# Altium PCB DS144-1.0-B溶解氧传感器.PcbDoc
Units mm, origin at the board's own origin, x right, y up, seen from the top; angles counter-clockwise.
Board outline 41 x 64 mm, 2 copper layers (Top Layer, Bottom Layer), stack 1.671 mm thick; 26 components, 33 nets, 97 pads, 89 vias.
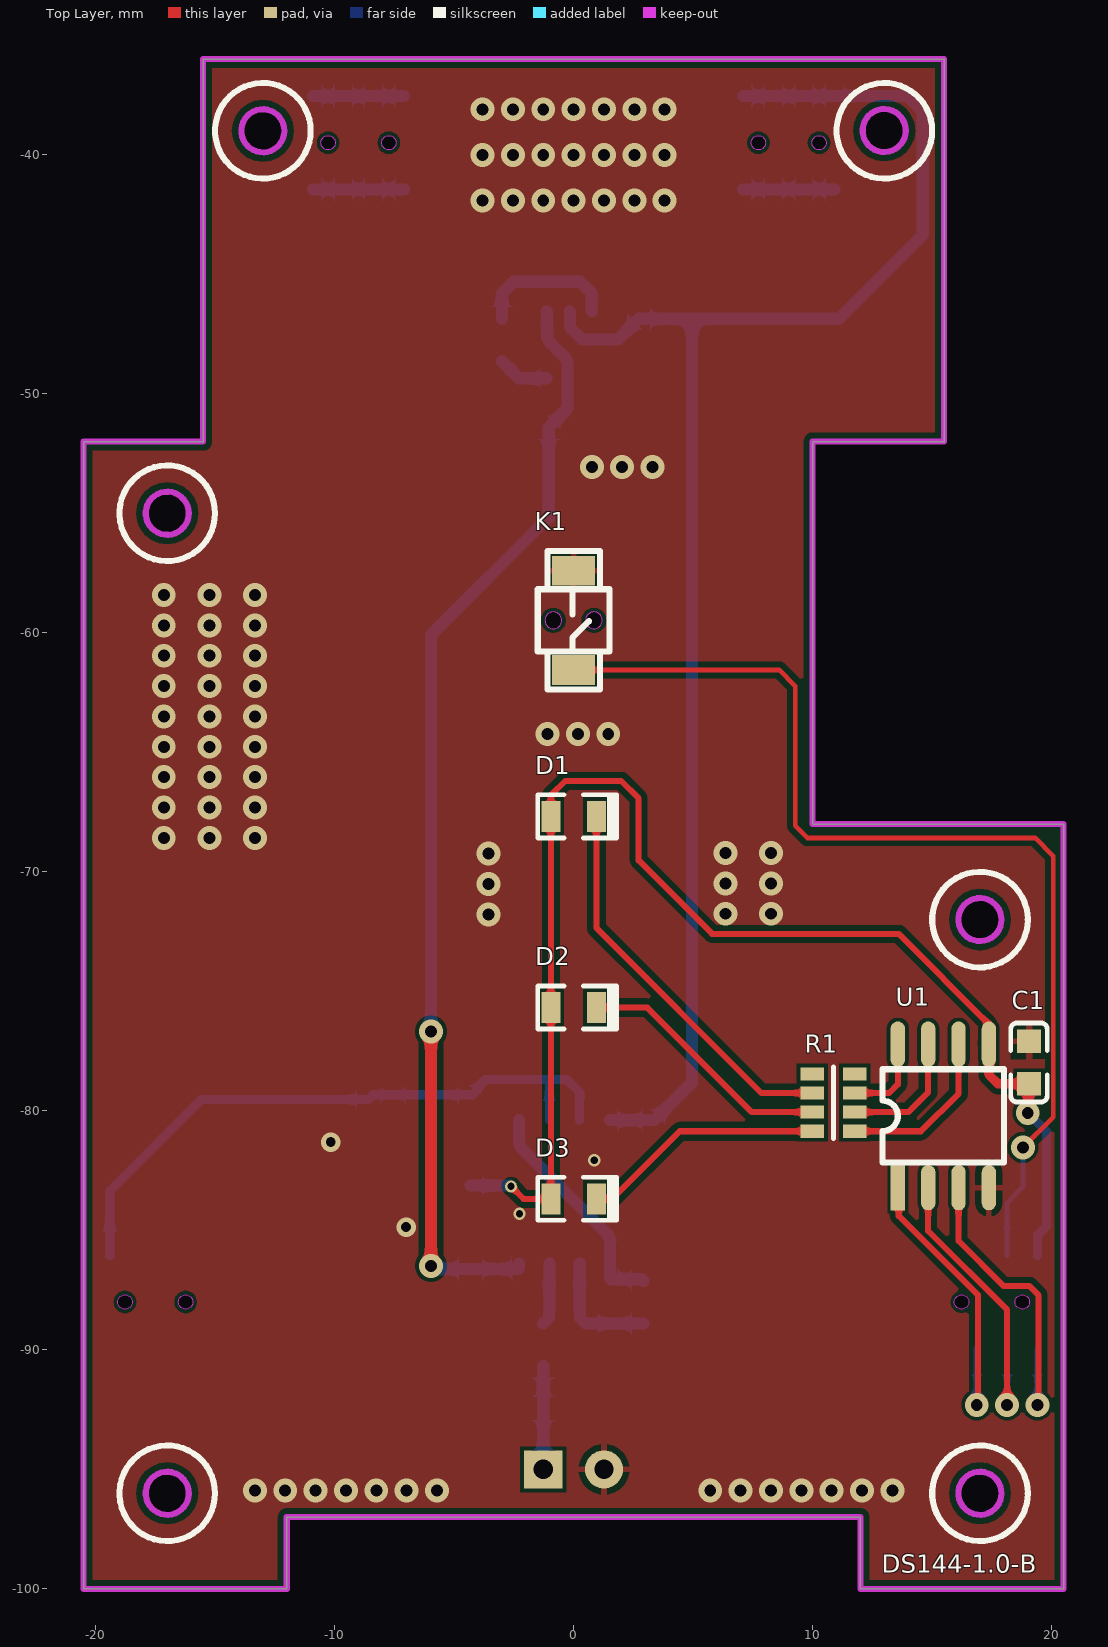
[diagram p0: Top Layer view]
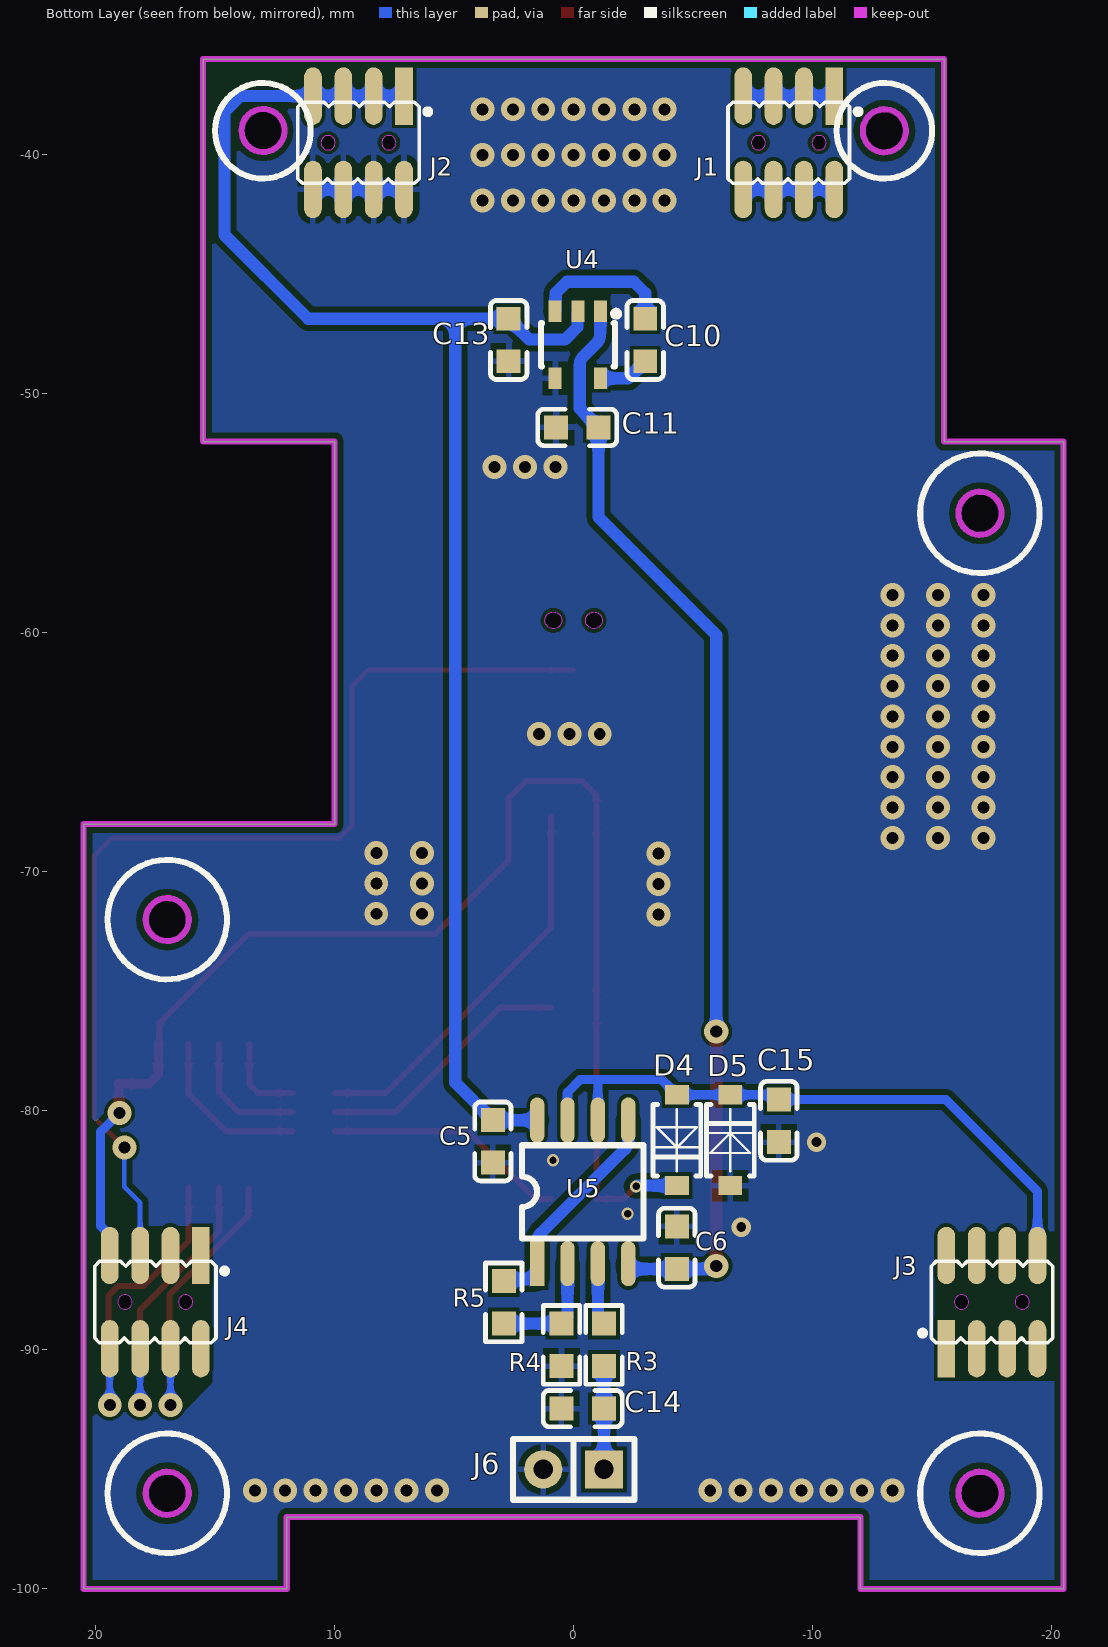
[diagram p1: Bottom Layer view, seen from below]
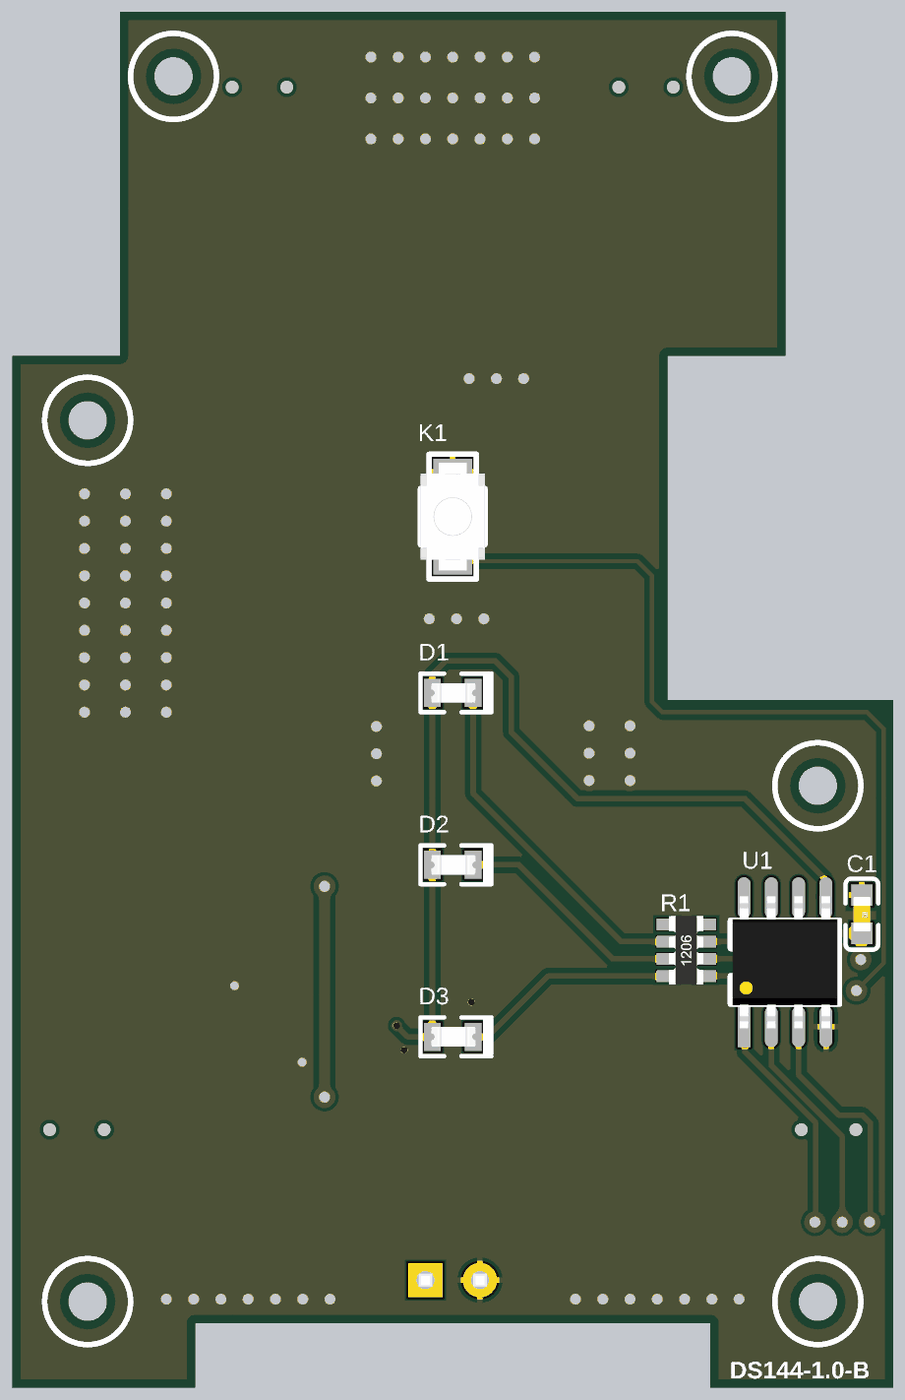
[diagram p2: 3D render of the assembled board from above, using the file's embedded part models]
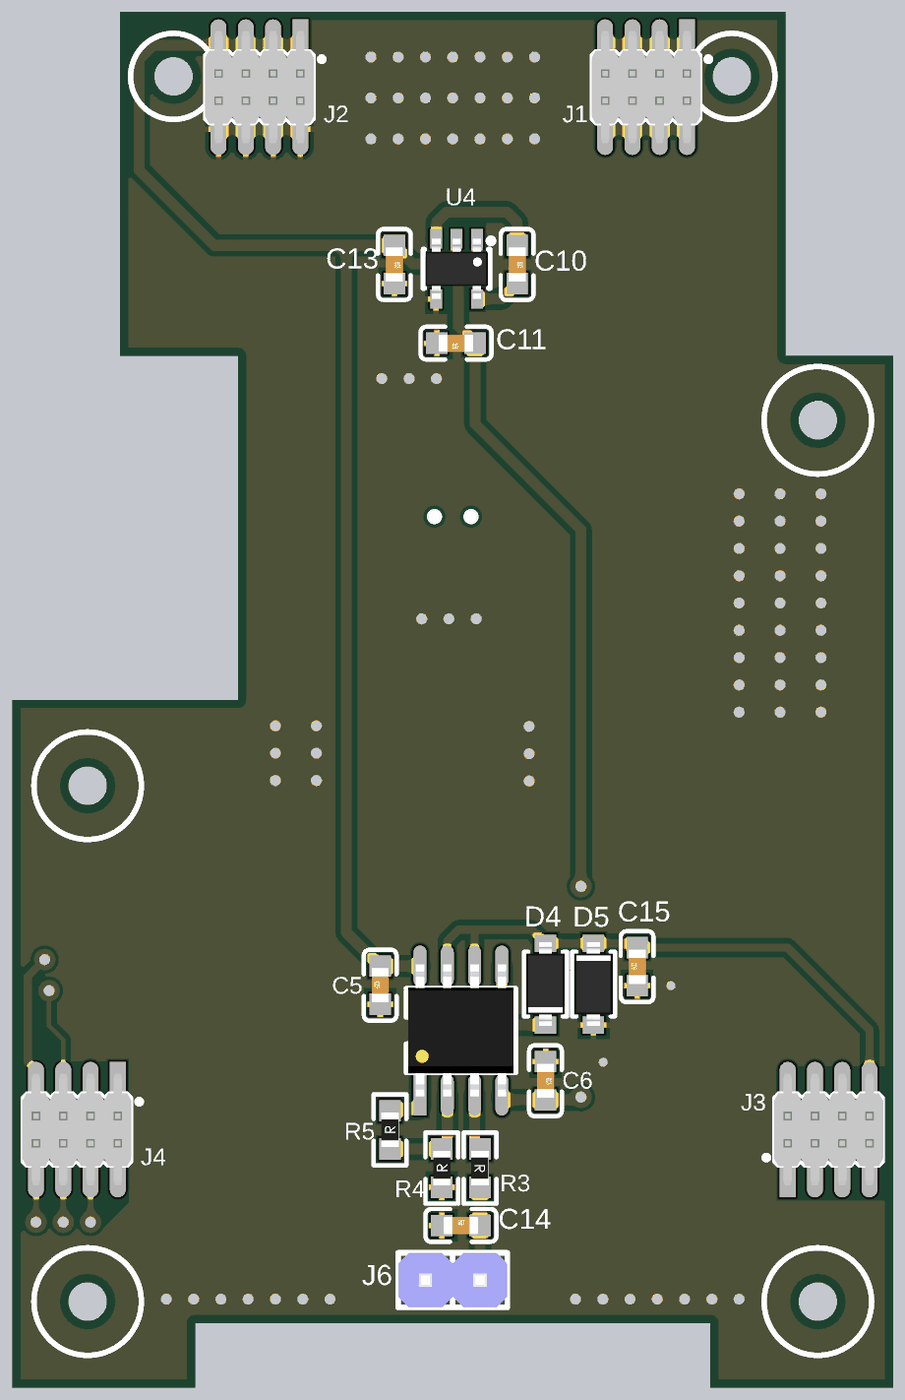
[diagram p3: 3D render of the assembled board from below, using the file's embedded part models]

## Layer stack, top to bottom
Top Solder: solder mask 0.0102, Solder Resist, Dk 3.5
Top Layer: signal copper 0.0356
Dielectric 1: dielectric 1.6, FR-4, Dk 4.8
Bottom Layer: signal copper 0.0356
Bottom Solder: solder mask 0.0102, Solder Resist, Dk 3.5

## Board outline
-20.5,-100 -20.5,-52 -15.5,-52 -15.5,-36 15.5,-36 15.5,-52 10,-52 10,-68 20.5,-68 20.5,-100 12,-100 12,-97 -12,-97 -12,-100
cut-out: -13.9,-39 ccw(c-13,-39) -13,-39.9 ccw(c-13,-39) -12.1,-39 ccw(c-13,-39) -13,-38.1 ccw(c-13,-39)
cut-out: 12.1,-39 ccw(c13,-39) 13,-39.9 ccw(c13,-39) 13.9,-39 ccw(c13,-39) 13,-38.1 ccw(c13,-39)
cut-out: -17.9,-55 ccw(c-17,-55) -17,-55.9 ccw(c-17,-55) -16.1,-55 ccw(c-17,-55) -17,-54.1 ccw(c-17,-55)
cut-out: 16.1,-72 ccw(c17,-72) 17,-72.9 ccw(c17,-72) 17.9,-72 ccw(c17,-72) 17,-71.1 ccw(c17,-72)
cut-out: 16.1,-96 ccw(c17,-96) 17,-96.9 ccw(c17,-96) 17.9,-96 ccw(c17,-96) 17,-95.1 ccw(c17,-96)
cut-out: -17.9,-96 ccw(c-17,-96) -17,-96.9 ccw(c-17,-96) -16.1,-96 ccw(c-17,-96) -17,-95.1 ccw(c-17,-96)

## Design rules (kind name [scope] priority, off if disabled: settings)
Clearance [All] p1: gap=0.152 ignorepadtopadclearanceinfootprint=TRUE except(0.254: Arc-Fill Arc-Poly Arc-Region Track-Fill Track-Poly Track-Region)
PlaneConnect [All] p1: pad.planeconnectstyle=Relief pad.reliefexpansion=0.508 pad.reliefentries=4 pad.reliefconductorwidth=0.254 pad.reliefairgap=0.254 via.planeconnectstyle=Direct via.reliefexpansion=0.508 via.reliefentries=4 via.reliefconductorwidth=0.254 via.reliefairgap=0.254
PolygonConnect [All] p1: thpad.connectstyle=Relief thpad.reliefconductorwidth=0.254 thpad.reliefentries=4 thpad.polygonreliefangle="90 Angle" thpad.airgapwidth=0.254 smdpad.connectstyle=Relief smdpad.reliefconductorwidth=0.254 smdpad.reliefentries=4 smdpad.polygonreliefangle="90 Angle" smdpad.airgapwidth=0.254 via.connectstyle=Direct via.reliefconductorwidth=0.254 via.reliefentries=4 via.polygonreliefangle="90 Angle" via.airgapwidth=0.254
RoutingVias [All] p1: holewidth=0.508 width=1.016 viastyle="Through Hole" minholewidth=0.305 minwidth=0.559 maxholewidth=0.711 maxwidth=1.524
SilkToSilkClearance [All] p1: silktosilkclearance=0.025
SilkToSolderMaskClearance [IsPad] p1: minsilkscreentomaskgap=0.102 clearancetoexposedcopper=TRUE
SolderMaskExpansion [All] p1: expansion=0.102 istentingtop=FALSE
Width [All] p1: maxlimit=0.508 minlimit=0.152 preferedwidth=0.254
27 further rules are at their usual default settings.

## Classes and differential pairs
net class J6_Nets: GND NetC14_2
net class D5_Nets: ADC0 GND
net class D4_Nets: ADC0 VCC_3V3_MCU
net class C15_Nets: ADC0 GND
net class C14_Nets: GND NetC14_2
net class C13_Nets: GND VCC_5V
net class C10_Nets: NetC10_1 NetC10_2
net class U5_Nets: ADC0 NetR3_1 NetR4_2 NetR5_2 VCC_5V VCC_-5V
net class U4_Nets: GND NetC10_1 NetC10_2 VCC_5V VCC_-5V
net class U1_Nets: Dis_blue_EN Dis_green_EN Dis_red_EN GND NetR1_1 NetR1_2 NetR1_3 VCC_3V3_MCU
net class R5_Nets: NetR4_2 NetR5_2
net class R4_Nets: GND NetR4_2
net class R3_Nets: NetC14_2 NetR3_1
net class R1_Nets: LED_blue LED_green LED_red NetR1_1 NetR1_2 NetR1_3
net class K1_Nets: GND KEY_HOME
net class J4_Nets: ADC1 Dis_blue_EN Dis_green_EN Dis_red_EN I2C1_SCL I2C1_SDA KEY_HOME VCC_3V3_MCU
net class J3_Nets: ADC0 DAC_OUT SPI2_CS SPI2_MISO SPI2_MOSI SPI2_SCK USART2_RXD USART2_TXD
net class J2_Nets: GND VCC_5V
net class J1_Nets: VBUS VSS
net class D3_Nets: LED_green VCC_3V3_MCU
net class D2_Nets: LED_red VCC_3V3_MCU
net class D1_Nets: LED_blue VCC_3V3_MCU
net class C6_Nets: GND VCC_-5V
net class C5_Nets: GND VCC_5V
net class C11_Nets: GND VCC_-5V
net class C1_Nets: GND VCC_3V3_MCU

## Components (designator, comment, footprint, x,y, rotation, side; value= is the part's Value field where it differs from the comment)
C1 "SMDCAP00013" 0603CAP 19.05,-77.978 r270 top value=100nF
C5 "SMDCAP00013" 0603CAP 3.378,-81.28 r90 bottom value=100nF
C6 "SMDCAP00013" 0603CAP -4.318,-85.725 r270 bottom value=100nF
C10 "SMDCAP00016" 0603CAP -2.997,-47.752 r270 bottom value=3.3uF
C11 "SMDCAP00016" 0603CAP -0.152,-51.41 r0 bottom value=3.3uF
C13 "SMDCAP00016" 0603CAP 2.718,-47.752 r270 bottom value=3.3uF
C14 "SMDCAP00010" 0603CAP -0.38,-92.456 r180 bottom value=10nF
C15 "SMDCAP00010" 0603CAP -8.585,-80.417 r90 bottom value=10nF
D1 "SMDLED00010" LED_0805 0,-67.68 r0 top value=BLUE
D2 "SMDLED00003" LED_0805 0,-75.68 r0 top value=RED
D3 "Chip 翠绿LED 0805" LED_0805 0,-83.68 r0 top value=GREEN
D4 "DIPDIODE02001" SOD-123 -4.318,-81.229 r270 bottom value=1N4148
D5 "DIPDIODE02001" SOD-123 -6.553,-81.229 r90 bottom value=1N4148
J1 "X1321WVS-2x04J-C40D53" X1321WVS-2x04J-C40D53 -9,-39.5 r0 bottom value=2*4P
J2 "X1321WVS-2x04J-C40D53" X1321WVS-2x04J-C40D53 9,-39.5 r0 bottom value=2*4P
J3 "X1321WVS-2x04J-C40D53" X1321WVS-2x04J-C40D53 -17.5,-88 r180 bottom value=2*4P
J4 "X1321WVS-2x04J-C40D53" X1321WVS-2x04J-C40D53 17.5,-88 r0 bottom value=2*4P
J6 "SL000000042" SIP2 0,-95 r0 bottom value=2P
K1 "TS-1185-B-A-A-A" KEY_TS-1185-x-A-A-A 0,-59.48 r270 top
R1 "SMDRES05003" 0603RES_Pack4 10.871,-79.655 r180 top value=510R
R3 "SMDRES00058" 0603RES -1.27,-89.789 r270 bottom value=20K
R4 "SMDRES00058" 0603RES 0.508,-89.789 r90 bottom value=20K
R5 "SMDRES00085" 0603RES 2.921,-88.011 r90 bottom value=1M
U1 "SMDIC000018" SO-8 15.469,-80.211 r90 top value=ULN2001
U4 "SGM3206" SOT23-5 -0.178,-47.953 r0 bottom value=丝印SL7NL
U5 "TL062C" SO-8 -0.381,-83.388 r90 bottom

## Footprints (in the part's own frame and the unit in brackets; to place one, negate y for a bottom-side part, rotate by r counter-clockwise, add the part's x,y. Pads: shape width x height; smd on the part's side, far side on the other; paste and mask are expansions set on the pad)
0603CAP [mm]
  rect 1x1 smd: 1(-0.889,0) 2(0.89,0)
  silkscreen extent -1.65,-0.76 1.65,0.76, body extent -0.8,-0.4 0.8,0.4, height 0.3
0603RES [mm]
  rect 1x1 smd: 1(-0.889,0) 2(0.889,0)
  silkscreen extent -1.65,-0.76 1.65,0.76, body extent -0.8,-0.41 0.8,0.41, height 0.51
0603RES_Pack4 [mm]
  rect 1x0.55 smd mask+0.05: 1(-0.889,1.2) 2(-0.889,0.4) 3(-0.889,-0.4) 4(-0.889,-1.2) 5(0.889,-1.2) 6(0.889,-0.4) 7(0.889,0.4) 8(0.889,1.2)
  silkscreen extent 0,-1.5 0,1.5, body extent -0.8,-1.6 0.8,1.6, height 0.5
KEY_TS-1185-x-A-A-A [mm]
  rect 1.25x1.8 smd: 1(-2.075,0) 2(2.075,0)
  Keep-Out Layer board cut-out: -0.35,0.85 -0.323,0.716 -0.247,0.603 -0.134,0.527 0,0.5 0,0.5 0.134,0.527 0.247,0.603 0.323,0.716 0.35,0.85 0.35,0.85 0.323,0.984 0.247,1.097 0.134,1.173 0,1.2 0,1.2 -0.134,1.173 -0.247,1.097 -0.323,0.984 -0.35,0.85
  Keep-Out Layer board cut-out: 0.35,-0.85 0.323,-0.716 0.247,-0.603 0.134,-0.527 0,-0.5 0,-0.5 -0.134,-0.527 -0.247,-0.603 -0.323,-0.716 -0.35,-0.85 -0.35,-0.85 -0.323,-0.984 -0.247,-1.097 -0.134,-1.173 0,-1.2 0,-1.2 0.134,-1.173 0.247,-1.097 0.323,-0.984 0.35,-0.85
  silkscreen extent -2.9,-1.5 2.9,1.5, body extent -2.5,-1.5 2.5,1.5, height 2
LED_0805 [mm]
  rect 0.8x1.3 smd: 1(-0.95,0) 2(0.95,0)
  silkscreen extent -1.5,-0.9 1.8,0.9, body extent -1,-0.45 1.06,0.45, height 0.85
SIP2 [mm]
  rect 1.6x1.6 hole 0.813: 1(-1.27,0)
  round 1.6 hole 0.813: 2(1.27,0)
  silkscreen extent -2.54,-1.27 2.54,1.27, body extent -2.54,-1.27 2.54,1.27, height 8.64
SO-8 [mm]
  rect 1.9x0.6 smd: 1(-3,1.905)
  oval 1.9x0.6 smd: 2(-3,0.635) 3(-3,-0.635) 4(-3,-1.905) 5(3,-1.905) 6(3,-0.635) 7(3,0.635) 8(3,1.905)
  silkscreen extent -1.95,-2.54 1.95,2.54, body extent -3.07,-2.44 3.07,2.44, height 1.77
SOD-123 [mm]
  rect 0.8x1 smd: 1(-1.9,0) 2(1.9,0)
  silkscreen extent -1.5,-1 1.5,1, body extent -1.95,-0.9 1.95,0.9, height 1.18
SOT23-5 [mm] "SOT-23/SC-74A; 5 Leads; Body 3.1 x 3 mm, inc. leads (LxW max)"
  rect 0.55x0.9 smd: 1(-0.95,-1.4) 2(0,-1.4) 3(0.95,-1.4) 4(0.95,1.4) 5(-0.95,1.4)
  silkscreen extent -1.7,-1.4 1.55,0.9, body extent -1.45,-1.4 1.45,1.4, height 1.45
X1321WVS-2x04J-C40D53 [mm]
  rect 0.74x2.4 smd: 1(-1.905,-1.95)
  oval 0.74x2.4 smd: 2(-1.905,1.95) 3(-0.635,-1.95) 4(-0.635,1.95) 5(0.635,-1.95) 6(0.635,1.95) 7(1.905,-1.95) 8(1.905,1.95)
  Keep-Out Layer board cut-out: 1.57,0 1.547,0.115 1.482,0.212 1.385,0.277 1.27,0.3 1.27,0.3 1.155,0.277 1.058,0.212 0.993,0.115 0.97,0 0.97,0 0.993,-0.115 1.058,-0.212 1.155,-0.277 1.27,-0.3 1.27,-0.3 1.385,-0.277 1.482,-0.212 1.547,-0.115 1.57,0
  Keep-Out Layer board cut-out: -1.57,0 -1.547,-0.115 -1.482,-0.212 -1.385,-0.277 -1.27,-0.3 -1.27,-0.3 -1.155,-0.277 -1.058,-0.212 -0.993,-0.115 -0.97,0 -0.97,0 -0.993,0.115 -1.058,0.212 -1.155,0.277 -1.27,0.3 -1.27,0.3 -1.385,0.277 -1.482,0.212 -1.547,0.115 -1.57,0
  silkscreen extent -3,-1.7 2.54,1.7, body extent -2.54,-2.6 2.54,2.6, height 5.5

## Part data
C1 C5 C6: library part "MLCC 100nF 50V ±10％ 0603", "贴片电容"
C10 C11 C13: library part "MLCC 10uF 50V ±10％ 0603", "贴片电容"
C14 C15: library part "MLCC 10nF 50V ±10％ 0603", "贴片电容"
D1: library part "Chip 蓝色LED 0805", "贴片LED"
D2: library part "Chip 红色LED 0805", "贴片LED"
D3: "贴片LED"
D4 D5: library part 1N4148W, "贴片开关二极管 T4"
J1 J2 J3 J4: "双排针2x4P 立贴 1.27mm"
J6: library part "DIP2 单排直针 1*40P 间距2.54mm 针长11mm 铜", "单排直针"
K1: "轻触开关"
R1: library part "Chip R*4 510R 1/16W ±5％ 0603", "贴片排阻"
R3 R4: library part "Chip 20K 1/16W ±1％ 0603", "贴片电阻"
R5: library part "Chip 1M 1/16W ±1％ 0603", "贴片电阻"
U1: library part "ULN2001 SOP-8", "电机驱动芯片"
U4: "电荷泵芯片"

## Via types
v1: diameter 1, hole 0.5, Top Layer to Bottom Layer, tented both sides, 82 vias
v2: diameter 0.508, hole 0.305, Top Layer to Bottom Layer, tented both sides, 3 vias
v3: diameter 1.016, hole 0.508, Top Layer to Bottom Layer, tented both sides, 2 vias
v4: diameter 0.813, hole 0.406, Top Layer to Bottom Layer, tented both sides, 2 vias

## Nets (pads, with @x,y where several pads share a name; then routed paths per layer and width w, separated by ;. In a path a pad name is that pad's centre, name@x,y a point inside that pad or via, vN(x,y) a via of type N, cw(c..) or ccw(c..) an arc to the next point about the centre after c; other vN are vias at no path point)
ADC0: C15.2 D4.1 D5.2 J3.8 U5.6 U5.7 | length 27.4
  Bottom Layer w0.381: J3.8 -19.405,-83.362 -15.57,-79.527 C15.2 -8.387,-79.329 D5.2 D4.1 -4.218,-79.329 -4.008,-79.12 -4.008,-79.02 -3.678,-78.689 -0.991,-78.689 ; U5.6 -1.016,-78.715 -0.991,-78.689 ; U5.7 0.254,-79.223 -0.279,-78.689 -0.991,-78.689
ADC1: J4.2
DAC_OUT: J3.6
Dis_blue_EN: J4.4 U1.1 | length 12.8
  Top Layer w0.254: U1.1@13.603,-83.25 13.603,-84.393 16.911,-87.701 16.911,-92.257 v1(16.865,-92.303)
  Bottom Layer w0.254: v1(16.865,-92.303) J4.4
Dis_green_EN: J4.8 U1.3 | length 13.5
  Top Layer w0.254: U1.3 16.104,-85.446 17.977,-87.319 19.052,-87.319 19.451,-87.718 19.451,-92.257 v1(19.405,-92.303)
  Bottom Layer w0.254: v1(19.405,-92.303) J4.8
Dis_red_EN: J4.6 U1.2 | length 12.8
  Top Layer w0.254: U1.2 14.834,-85.027 18.135,-88.328 v1(18.135,-92.303)
  Bottom Layer w0.254: v1(18.135,-92.303) J4.6
GND: C1.1 C5.1 C6.1 C11.2 C13.2 C14.1 C15.1 D5.1 J2.2 J2.4 J2.6 J2.8 J6.2 K1.1 R4.1 U1.4 U4.4 | length 3.8
  Bottom Layer w0.508: J2.2 J2.4 J2.6 J2.8
  other v1: -13.335,-95.885 -12.065,-95.885 -10.795,-95.885 -9.525,-95.885 -8.255,-95.885 -6.985,-95.885 -5.715,-95.885 5.715,-95.885 6.985,-95.885 8.255,-95.885 9.525,-95.885 10.795,-95.885 12.065,-95.885 13.335,-95.885 -3.556,-71.78 6.35,-71.755 8.255,-71.755 -3.556,-70.51 6.35,-70.485 8.255,-70.485 -3.556,-69.24 6.35,-69.215 8.255,-69.215 -17.145,-68.58 -15.24,-68.58 -13.335,-68.58 -17.145,-67.31 -15.24,-67.31 -13.335,-67.31 -17.145,-66.04 -15.24,-66.04 -13.335,-66.04 -17.145,-64.77 -15.24,-64.77 -13.335,-64.77 -1.092,-64.237 0.178,-64.237 1.448,-64.237 -17.145,-63.5 -15.24,-63.5 -13.335,-63.5 -17.145,-62.23 -15.24,-62.23 -13.335,-62.23 -17.145,-60.96 -15.24,-60.96 -13.335,-60.96 -17.145,-59.69 -15.24,-59.69 -13.335,-59.69 -17.145,-58.42 -15.24,-58.42 -13.335,-58.42 0.762,-53.061 2.032,-53.061 3.302,-53.061 -3.81,-41.91 -2.54,-41.91 -1.27,-41.91 0,-41.91 1.27,-41.91 2.54,-41.91 3.81,-41.91 -3.81,-40.005 -2.54,-40.005 -1.27,-40.005 0,-40.005 1.27,-40.005 2.54,-40.005 3.81,-40.005 -3.81,-38.1 -2.54,-38.1 -1.27,-38.1 0,-38.1 1.27,-38.1 2.54,-38.1 3.81,-38.1
  other v2: -2.261,-84.303 0.864,-82.067
  other v4: -7.01,-84.861 -10.16,-81.305
I2C1_SCL: J4.1
I2C1_SDA: J4.3
KEY_HOME: J4.5 K1.2 | length 44.2
  Top Layer w0.2: K1.2 8.596,-61.555 9.271,-62.23 9.271,-68.072 9.779,-68.58 19.304,-68.58 20.066,-69.342 20.066,-80.264 v1(18.796,-81.534)
  Bottom Layer w0.2: J4.5 18.135,-83.846 18.796,-83.185 v1(18.796,-81.534)
LED_blue: D1.2 R1.6 | length 16.6
  Top Layer w0.254: D1.2 0.95,-72.35 7.855,-79.255 R1.6
LED_green: D3.2 R1.8 | length 10.2
  Top Layer w0.254: D3.2 1.613,-83.68 4.439,-80.855 R1.8
LED_red: D2.2 R1.7 | length 10.8
  Top Layer w0.254: D2.2 3.087,-75.68 7.461,-80.055 R1.7
NetC10_1: C10.1 U4.3 | length 6
  Bottom Layer w0.508: C10.1 -2.997,-45.796 -2.515,-45.314 0.279,-45.314 0.752,-45.786 0.752,-46.532 U4.3
NetC10_2: C10.2 U4.5 | length 2.2
  Bottom Layer w0.508: C10.2 -2.287,-49.353 U4.5
NetC14_2: C14.2 J6.1 R3.2 | length 4.3
  Bottom Layer w0.508: J6.1 C14.2 R3.2
NetR1_1: R1.1 U1.6 | length 7.1
  Top Layer w0.254: R1.1 14.529,-80.855 16.104,-79.28 U1.6
NetR1_2: R1.2 U1.7 | length 5.4
  Top Layer w0.254: R1.2 14.002,-80.055 14.834,-79.223 U1.7
NetR1_3: R1.3 U1.8 | length 3.6
  Top Layer w0.254: R1.3 13.202,-79.255 13.564,-78.893 U1.8
NetR3_1: R3.1 U5.3 | length 2.6
  Bottom Layer w0.508: R3.1 -1.024,-88.654 -1.024,-88.364 -1.016,-88.356 U5.3
NetR4_2: R4.2 R5.1 U5.2 | length 5
  Bottom Layer w0.508: U5.2 0.254,-88.356 0.262,-88.364 0.262,-88.654 R4.2 R5.1
NetR5_2: R5.2 U5.1 U5.5 | length 9.6
  Bottom Layer w0.508: U5.5 -2.286,-81.25 ccw(c-1.778,-81.247) -2.139,-81.605 1.376,-85.12 cw(c1.016,-85.478) 1.524,-85.478 U5.1 1.524,-86.998 1.57,-87.044 2.843,-87.044 R5.2
SPI2_CS: J3.4
SPI2_MISO: J3.1
SPI2_MOSI: J3.3
SPI2_SCK: J3.2
USART2_RXD: J3.5
USART2_TXD: J3.7
VBUS: J1.2 J1.4 J1.6 J1.8 | length 3.8
  Bottom Layer w0.508: J1.2 J1.4 J1.6 J1.8
VCC_3V3_MCU: C1.2 D1.1 D2.1 D3.1 D4.2 J4.7 U1.5 | length 56.4
  Top Layer w0.254: v2(-2.616,-83.16) -2.096,-83.68 D3.1 D2.1 D1.1 -0.95,-66.802 -0.34,-66.193 1.981,-66.193 2.718,-66.929 2.718,-69.52 5.796,-72.598 13.594,-72.598 17.332,-76.336 U1.5@17.332,-77.169
  Top Layer w0.381: U1.5@17.332,-77.169 U1.5 17.374,-78.486 17.756,-78.868 C1.2 19.025,-78.894 19.025,-80.061 v1(18.999,-80.086)
  Bottom Layer w0.381: v1(18.999,-80.086) 19.787,-80.874 19.787,-84.818 19.405,-85.199 J4.7
  Bottom Layer w0.508: D4.2 -2.647,-83.129 v2(-2.616,-83.16)
VCC_5V: C5.2 C13.1 J2.1 J2.3 J2.5 J2.7 U4.2 U5.8 | length 66.4
  Bottom Layer w0.508: U4.2 -0.157,-46.574 -0.157,-47.214 0.356,-47.727 1.854,-47.727 C13.1 4.953,-46.863 ; U5.8 1.526,-80.39 C5.2 4.953,-78.815 4.953,-46.863 ; J2.1 J2.3 J2.5 J2.7 13.953,-37.55 14.605,-38.202 14.605,-43.358 11.1,-46.863 4.953,-46.863
VCC_-5V: C6.2 C11.1 U4.1 U5.4 | length 46.6
  Top Layer w0.508: v3(-5.969,-86.487) v3(-5.969,-76.683)
  Bottom Layer w0.508: v3(-5.969,-86.487) -5.832,-86.487 -5.704,-86.615 C6.2 -2.328,-86.615 -2.286,-86.573 U5.4 ; v3(-5.969,-76.683) -5.969,-60.096 -1.041,-55.169 C11.1 -0.254,-50.622 -0.254,-48.801 ccw(c-0.762,-48.801) -0.402,-48.442 -0.959,-47.885 cw(c-0.599,-47.527) -1.107,-47.527 -1.107,-46.574 U4.1
VSS: J1.1 J1.3 J1.5 J1.7 | length 3.8
  Bottom Layer w0.508: J1.1 J1.3 J1.5 J1.7
pads on no net: R1.4 R1.5

## Polygon pours and split planes (outlines as drawn)
GND on Bottom Layer "GND_L02_P001" (solid, remove dead copper, pour order 1): -20.5,-100 -20.5,-52 -15.5,-52 -15.5,-36 15.5,-36 15.5,-52 10,-52 10,-68 20.5,-68 20.5,-100 12,-100 12,-97 -12,-97 -12,-100
GND on Top Layer "GND_L01_P002" (solid, remove dead copper, pour order 2): -20.5,-100 -20.5,-52 -15.5,-52 -15.5,-36 15.5,-36 15.5,-52 10,-52 10,-68 20.5,-68 20.5,-100 12,-100 12,-97 -12,-97 -12,-100

## Keep-outs
Keep-Out Layer:
  circle w0.254: c-17.001,-96 r0.901
  circle w0.254: c16.999,-96 r0.901
  circle w0.254: c16.999,-72 r0.901
  circle w0.254: c-17.001,-55 r0.901
  circle w0.254: c12.993,-38.989 r0.901
  circle w0.254: c-13,-39 r0.901
  lines w0.254: -20.5,-100 -12,-100 -12,-97 12,-97 12,-100 20.5,-100 20.5,-68 10,-68 10,-52 15.5,-52 15.5,-36 -15.5,-36 -15.5,-52 -20.5,-52 -20.5,-100

## Other copper
Bottom Layer:
  pour cut-out: -15.103,-85.016 -15.126,-85.039 -20.117,-85.039 -20.117,-91.262 -20.077,-91.303 -15.073,-91.303
  pour cut-out: 15.088,-84.811 16.744,-84.811 20.015,-84.811 20.015,-92.604 16.306,-92.604 15.088,-91.386

## Silkscreen, mask and mechanical layers (free items; w line width, h text height)
Top Overlay:
  circle w0.254: c-13,-39 r2
  circle w0.254: c13,-39 r2
  circle w0.254: c-17,-96 r2
  circle w0.254: c17,-96 r2
  circle w0.254: c17,-72 r2
  circle w0.254: c-17,-55 r2
  text "DS144-1.0-B" at 12.892,-99.571 h1.27
Bottom Overlay:
  circle w0.254: c-13,-39 r2
  circle w0.254: c13,-39 r2
  circle w0.254: c-17,-96 r2.5
  circle w0.254: c17,-96 r2.5
  circle w0.254: c17,-72 r2.5
  circle w0.254: c-17,-55 r2.5
Mechanical 1:
  circle w0.254: c-13,-39 r0.9
  circle w0.254: c13,-39 r0.9
  circle w0.254: c17,-72 r0.9
  circle w0.254: c-17,-55 r0.9
  circle w0.254: c17,-96 r0.9
  circle w0.254: c-17,-96 r0.9
  lines w0.254: -20.5,-100 -20.5,-52 -15.5,-52 -15.5,-36 15.5,-36 15.5,-52 10,-52 10,-68 20.5,-68 20.5,-100 12,-100 12,-97 -12,-97 -12,-100 -20.5,-100
Mechanical 15:
  circle w0.254: c0,-83.68 r0.6
  circle w0.254: c0,-75.68 r0.6
  circle w0.254: c0,-67.68 r0.6
  circle w0.254: c0,-59.48 r1.5